# Altium PCB SWITCH_BLE_PCB_V1I1.PcbDoc
Units mil, origin at the board's own origin, x right, y up, seen from the top; angles counter-clockwise.
Board outline 2445 x 1750 mil, 2 copper layers (Top Layer, Bottom Layer); 19 components, 19 nets, 55 pads, 9 vias.
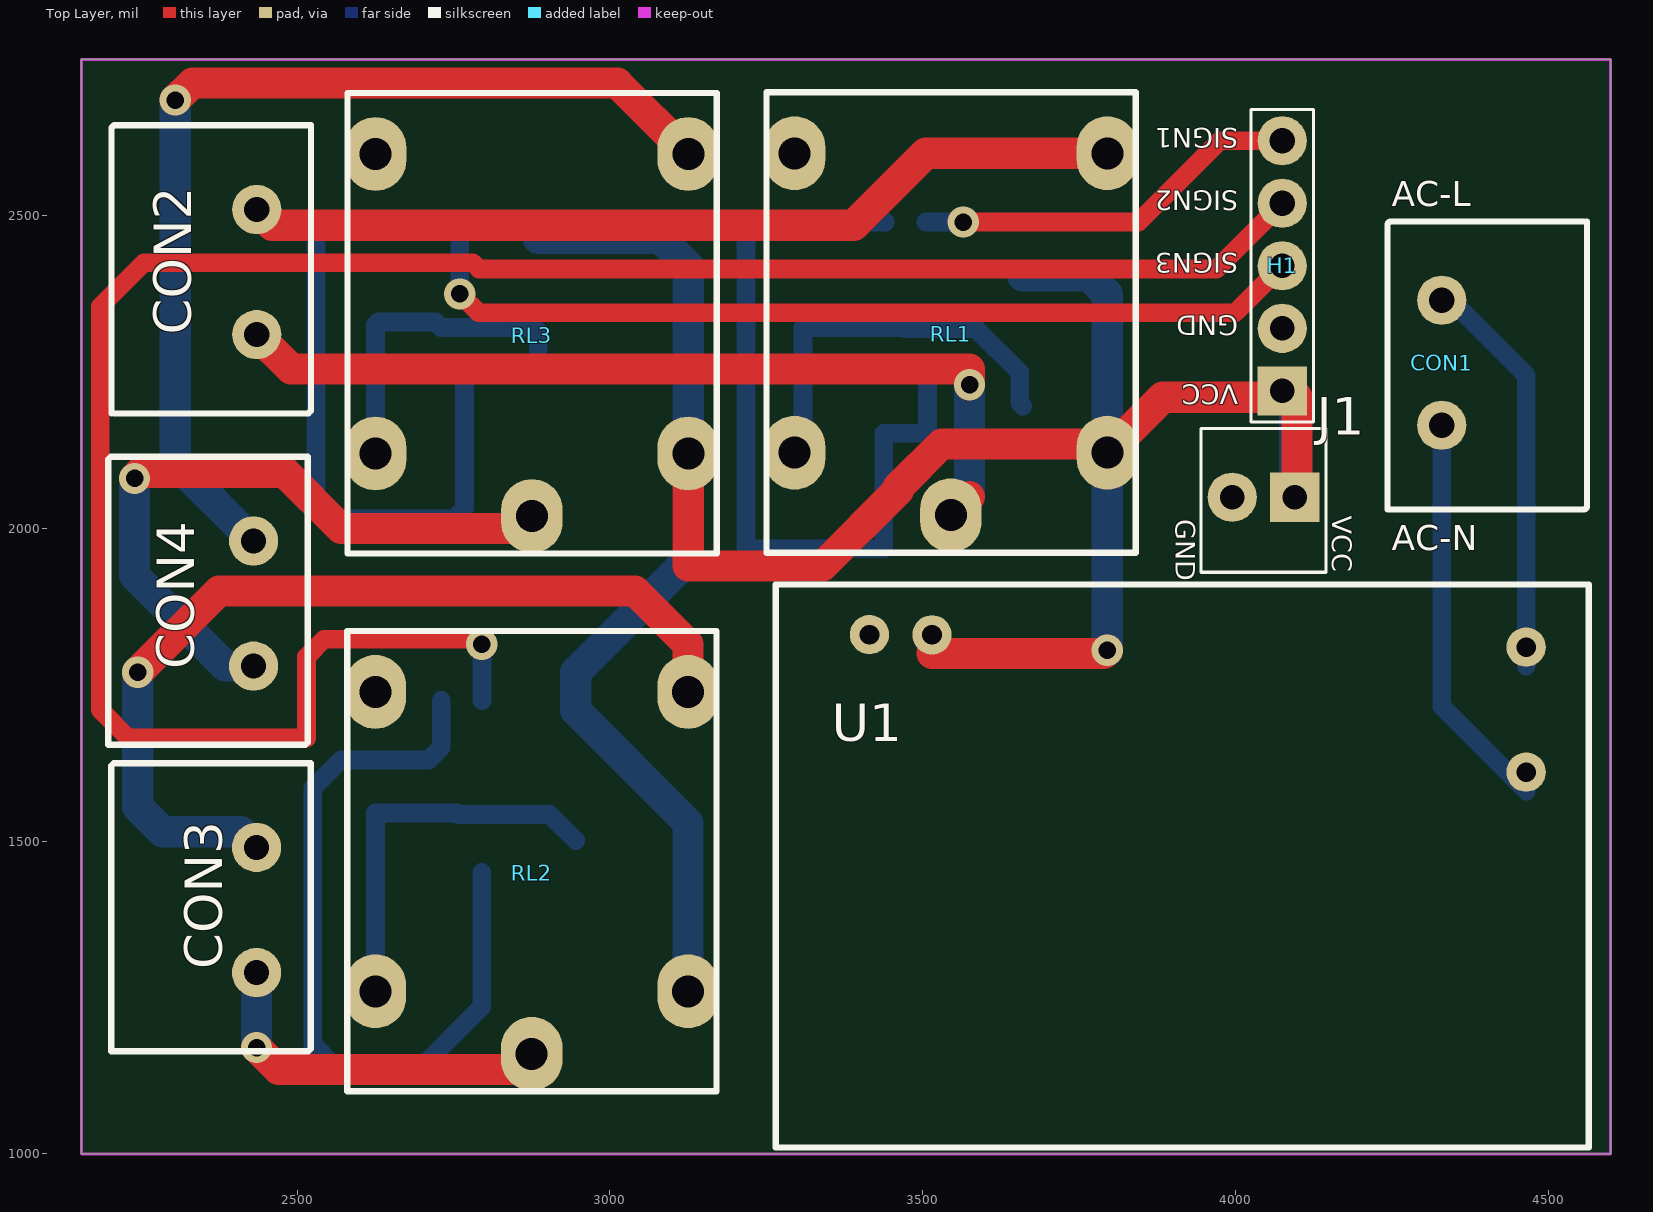
[diagram p0: Top Layer view]
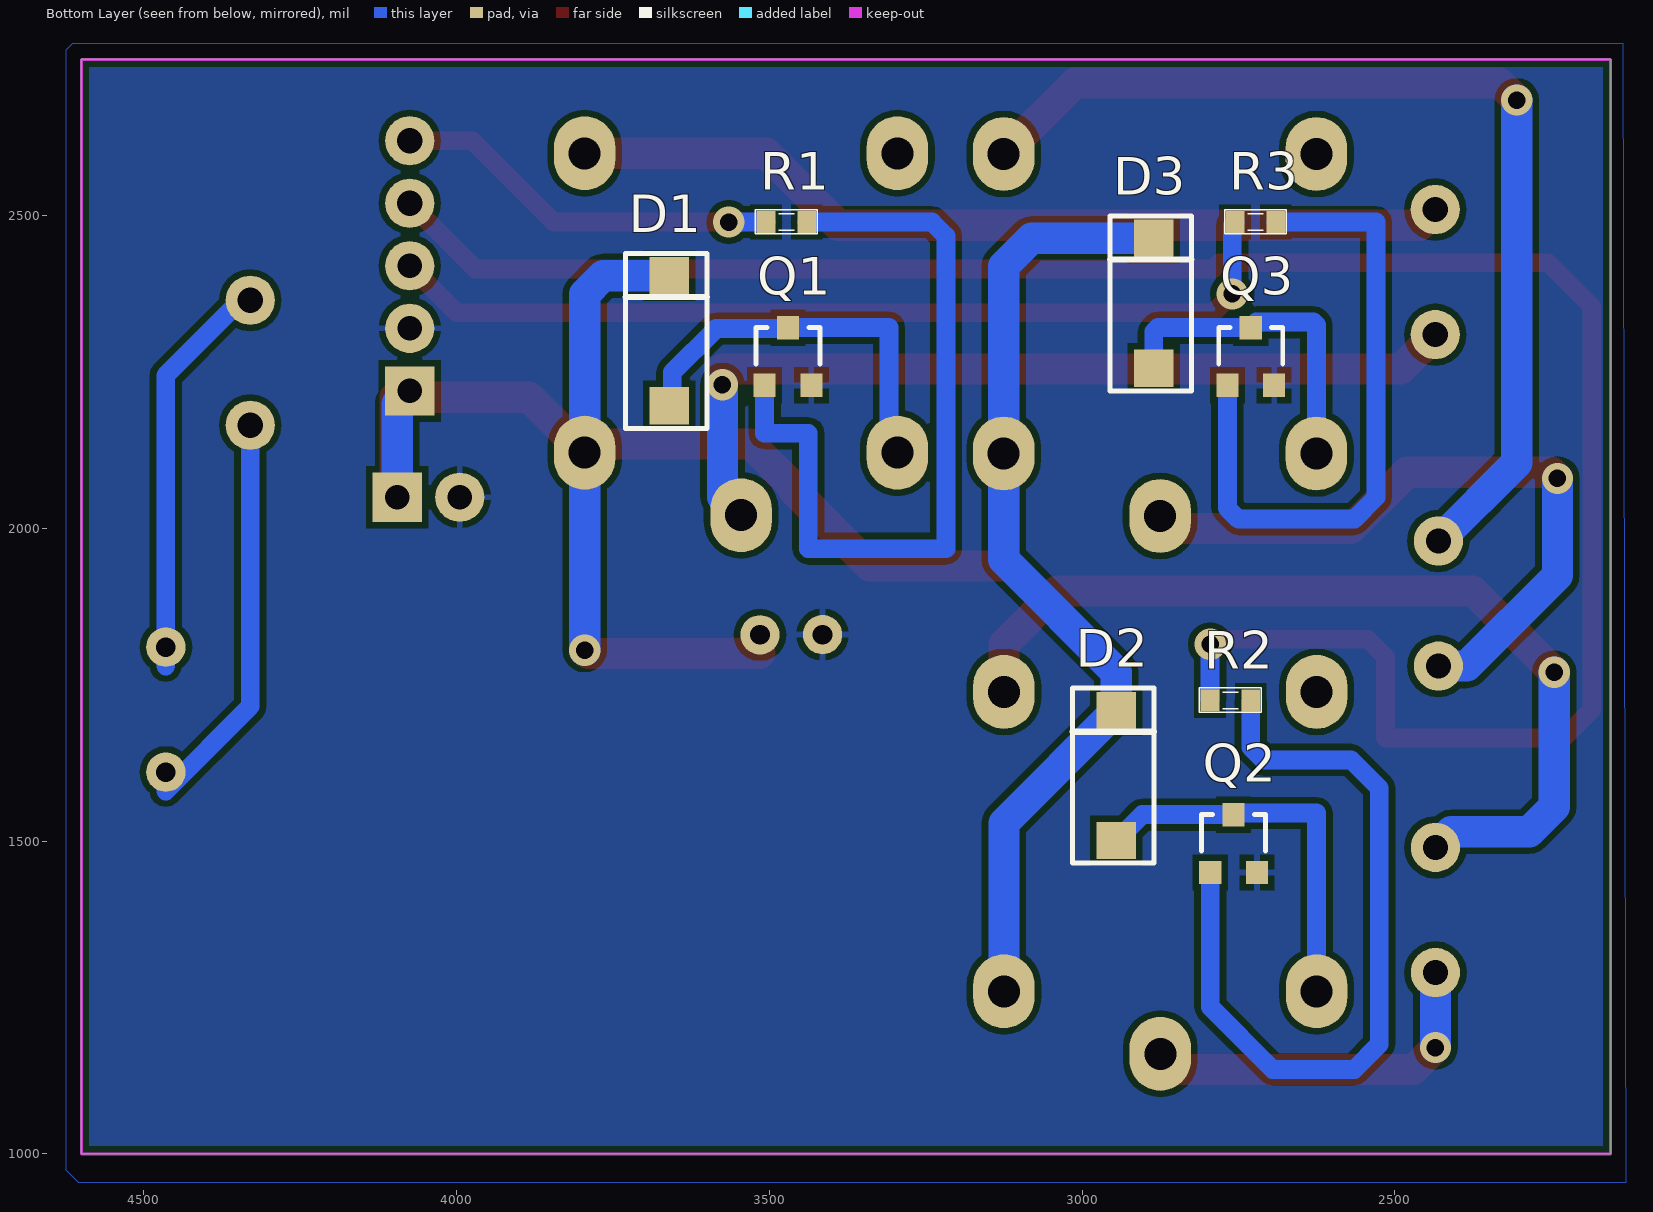
[diagram p1: Bottom Layer view, seen from below]
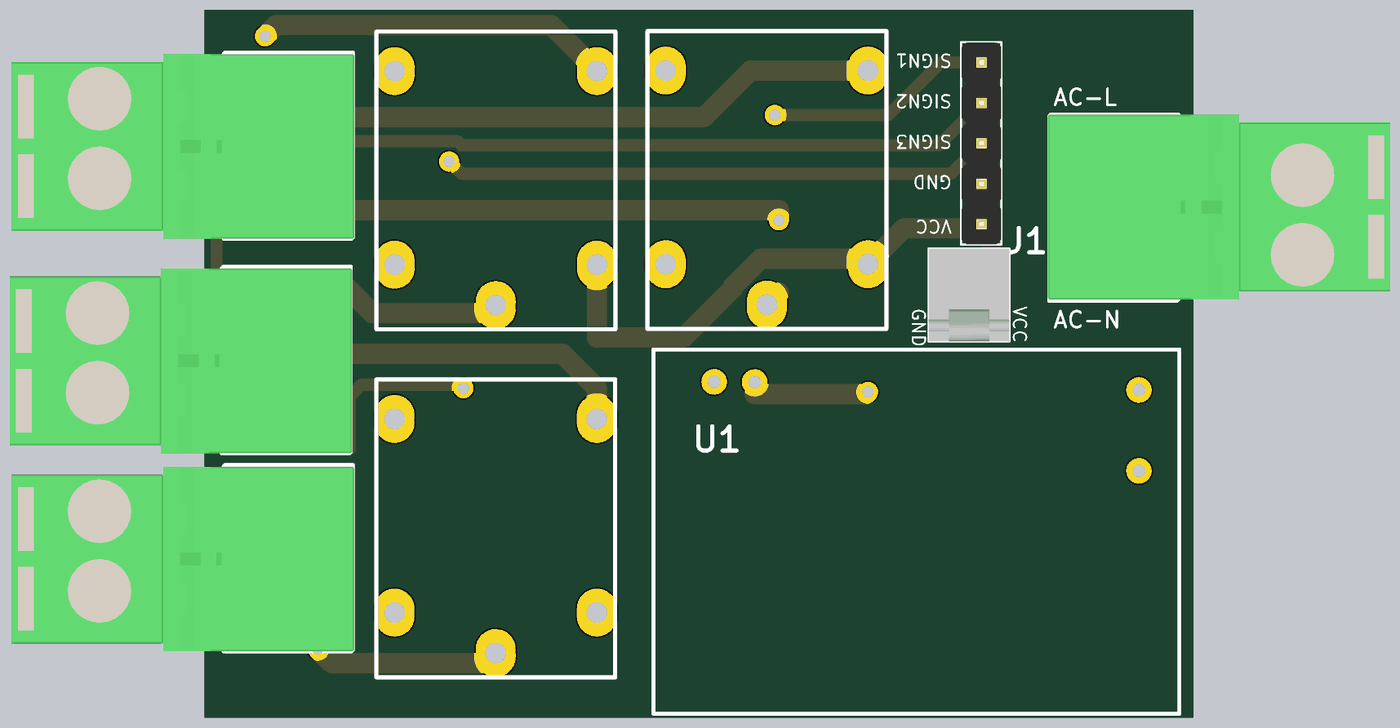
[diagram p2: 3D render of the assembled board from above, using the file's embedded part models]
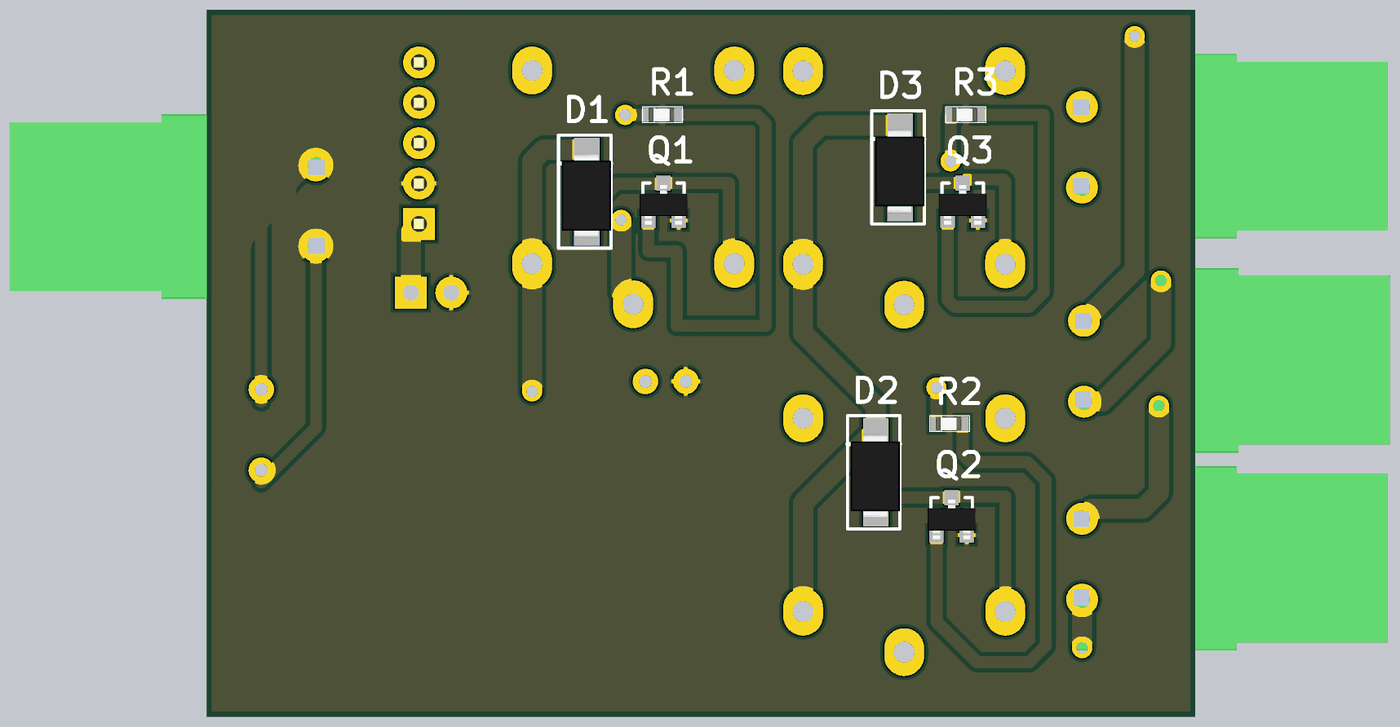
[diagram p3: 3D render of the assembled board from below, using the file's embedded part models]

## Layer stack, top to bottom
Top Solder: solder mask 0.4, Solder Resist, Dk 3.5
Top Layer: signal copper 1.4
Dielectric 1: dielectric 12.6, FR-4, Dk 4.8
Bottom Layer: signal copper 1.4
Bottom Solder: solder mask 0.4, Solder Resist, Dk 3.5

## Board outline
2155,1000 2155,2750 4600,2750 4600,1000

## Design rules (kind name [scope] priority, off if disabled: settings)
Clearance [All] p1: gap=10
PolygonConnect [All] p1: connectstyle=Relief reliefconductorwidth=10 reliefentries=4 polygonreliefangle="90 Angle" airgapwidth=10
RoutingVias [All] p1: holewidth=28 width=50 viastyle="Through Hole" minholewidth=28 minwidth=50 maxholewidth=28 maxwidth=50
SolderMaskExpansion [All] p1: expansion=4
Width [All] p1: maxlimit=100 minlimit=10 preferedwidth=25
30 further rules are at their usual default settings.

## Components (designator, comment, footprint, x,y, rotation, side; value= is the part's Value field where it differs from the comment)
CON1 "CON_HEADER_MALE_PIN2_5.08" CON_HEADER_MALE_VAC 4330,2365 r270 top
CON2 "CON_HEADER_MALE_PIN2_5.08" CON_HEADER_MALE_PIN2 2435.29,2310 r90 top
CON3 "CON_HEADER_MALE_PIN2_5.08" CON_HEADER_MALE_PIN2 2435,1290 r90 top
CON4 "CON_HEADER_MALE_PIN2_5.08" CON_HEADER_MALE_PIN2 2430.29,1780 r90 top
D1 "DIODE_M7_taobaoSMD_1A" DIODE_SMD_M7 3660,2300 r90 bottom
D2 "DIODE_M7_taobaoSMD_1A" DIODE_SMD_M7 2945.29,1605 r90 bottom
D3 "DIODE_M7_taobaoSMD_1A" DIODE_SMD_M7 2885.29,2360 r90 bottom
H1 "HEADER5_SIGN_HOLE_2.54" HEADER5_SIGN_HOLE_2.54 4075,2220 r90 top
J1 "5VCC" "CON_HEADER_MALE_POWER_PIN2_FRICTIONLOCK - duplicate" 4095,2050 r180 top
Q1 "TRAN-NPN-SMD" TRAN-NPN-SMD 3470.29,2275 r180 bottom
Q2 "TRAN-NPN-SMD" TRAN-NPN-SMD 2757.69,1496.26 r180 bottom
Q3 "TRAN-NPN-SMD" TRAN-NPN-SMD 2730.29,2275 r180 bottom
R1 "R_1K_SMD0603_1%_1/10W" RES_SMD0603 3460.29,2490 r180 bottom
R2 "R_1K_SMD0603_1%_1/10W" RES_SMD0603 2750.29,1725 r180 bottom
R3 "R_1K_SMD0603_1%_1/10W" RES_SMD0603 2710.29,2490 r180 bottom
RL1 "Relay 10A/12V" RELAY_HOLE5PINS_10A 3545.29,2021.26 r0 top
RL2 "Relay 10A/12V" RELAY_HOLE5PINS_10A 2875,1160 r0 top
RL3 "Relay 10A/12V" RELAY_HOLE5PINS_10A 2875.29,2020 r0 top
U1 "POWER_CONVERT_220VACto5VDC" POWER_CONVERT220VACto5VDC 4465,1810.32 r180 top

## Footprints (in the part's own frame and the unit in brackets; to place one, negate y for a bottom-side part, rotate by r counter-clockwise, add the part's x,y. Pads: shape width x height; smd on the part's side, far side on the other; paste and mask are expansions set on the pad)
CON_HEADER_MALE_PIN2 [mm]
  round 2 hole 1.02: 1(0,0) 2(5.08,0)
  silkscreen extent -3.2,-2.2 8.5,5.9, body extent -3.2,-2.3 8.4,19.2, height 15.5
"CON_HEADER_MALE_POWER_PIN2_FRICTIONLOCK - duplicate" [mm] "HEADER, SINGLE, DISTANCE = 100mil"
  rect 2x2 hole 1: 1(0,0)
  round 2 hole 1: 2(2.54,0)
  silkscreen extent -1.27,-2.79 3.81,3.05, body extent -1.27,-2.79 3.81,3.05, height 10.03
CON_HEADER_MALE_VAC [mm]
  round 2 hole 1.02: 1(0,0) 2(5.08,0)
  silkscreen extent -3.2,-2.2 8.5,5.9, body extent -3.2,-2.3 8.4,19.2, height 15.5
DIODE_SMD_M7 [mm]
  rect 1.52x1.6 smd: A(-2.64,0) K(2.64,0)
  silkscreen extent -3.56,-1.52 3.56,1.78, body extent -2.9,-1.52 2.4,1.58, height 2.4
HEADER5_SIGN_HOLE_2.54 [mm] "HEADER, SINGLE, DISTANCE = 100mil"
  rect 2x2 hole 1: 1(0,0)
  round 2 hole 1: 2(2.54,0) 3(5.08,0)
  round 2 hole 1.02: 4(7.62,0) 5(10.16,0)
  silkscreen extent -1.27,-1.27 11.43,1.27, body extent -1.27,-1.27 11.43,1.22, height 8.54
POWER_CONVERT220VACto5VDC [mm]
  round 1.6 hole 0.8: 1(0,0) 2(0,5.08) 3(26.67,-0.508) 4(24.13,-0.5)
  silkscreen extent -2.54,-2.54 30.48,20.32, body extent -1.27,-1.27 29.21,19.05, height 15
RELAY_HOLE5PINS_10A [mm]
  oval 2.5x3 hole 1.3: 1(0,0) 2(-6.35,14.7) 3(6.35,14.7) 4(-6.35,2.54) 5(6.35,2.54)
  silkscreen extent -7.49,-1.52 7.51,17.18, body extent -7.49,-1.52 7.49,17.14, height 16
RES_SMD0603 [mil] "Compoment SMD 60x30mil"
  rect 30x35 smd: 1(-45,0) 2(20,0)
  silkscreen extent -62,-19 37,20, body extent -46,-17 17,17, height 19
TRAN-NPN-SMD [mm] "SOT-23; 3 Leads; Body 3.0 x 2.5 mm, inc. leads (LxW max)"
  rect 0.9x0.95 smd: 1(-0.95,-1.175) 2(0.95,-1.175) 3(0,1.175)
  silkscreen extent -1.3,-0.3 1.3,1.18, body extent -1.5,-1.44 1.5,1.06, height 1.06

## Part data
CON1 CON2 CON3 CON4: "TERM BLOCK HDR 2POS R/A 5.08MM"
D1 D2 D3: "DIODE 1000V 1A SMD M7"
H1: "CONN HEADER 5 POS 2.54"
J1: library part CON_HEADER_POWER_MALE_PIN2_2.54_1, "CONN HEADER VERT 2POS .100 TIN"
Q1 Q2 Q3: "NPN 600mW, ECB"
R1 R2 R3: "RES SMD 1K OHM 1% 1/10W 0603"
RL1 RL2 RL3: library part RELAY_SPDT_HOLE5_10A_12VDC, "Relay SPDT,10A - 12VDC 5 Pin"

## Via types
v1: diameter 50, hole 28, Top Layer to Bottom Layer, 9 vias

## Nets (pads, with @x,y where several pads share a name; then routed paths per layer and width w, separated by ;. In a path a pad name is that pad's centre, name@x,y a point inside that pad or via, vN(x,y) a via of type N, cw(c..) or ccw(c..) an arc to the next point about the centre after c; other vN are vias at no path point)
5VCC: D1.K D2.K D3.K H1.1 J1.1 RL1.5 RL2.5 RL3.5 U1.4 | length 4185.4
  Top Layer w50: RL3.5 3125.29,1940 3340,1940 3461.08,2061.08 3461.08,2065.98 3530.09,2135 3781.55,2135 RL1.5 3884.03,2210 4098.74,2210 4098.74,2053.74 J1.1 ; U1.4@3515.29,1800 3790,1800 v1(3795.29,1805.29)
  Bottom Layer w50: D3.K 3081.06,2463.94 3125.29,2419.71 RL3.5 3125.29,1950.29 2945.29,1770.29 D2.K 3125,1529.23 RL2.5 ; D1.K 3766.06,2403.94 3795.29,2374.71 RL1.5 v1(3795.29,1805.29) ; H1.1 4095,2200 J1.1
GND: H1.2 J1.2 Q1.2 Q2.2 Q3.2 U1.3
NetCON1_1: CON1.1 U1.1 | length 649.5
  Bottom Layer w30: CON1.1 4345,2365 4465.29,2244.71 U1.1@4465.29,1780.32
NetCON1_2: CON1.2 U1.2 | length 640.7
  Bottom Layer w30: CON1.2 4330,1715.6 U1.2@4465.29,1580.32
NetCON2_1: CON2.1 RL1.1 | length 1450.6
  Top Layer w50: CON2.1 2490.29,2255 3575,2255 v1(3575,2230) ; RL1.1 RL1.1@3575,2050.97
  Bottom Layer w50: RL1.1 3575,2050.97 v1(3575,2230)
NetCON2_2: CON2.2 RL1.3 | length 1418
  Top Layer w50: CON2.2 2460.29,2485 3390,2485 3505,2600 RL1.3
NetCON3_1: CON3.1 RL2.1 | length 584.9
  Top Layer w50: v1(2435,1170) 2470,1135 2850,1135 RL2.1
  Bottom Layer w50: v1(2435,1170) CON3.1
NetCON3_2: CON3.2 RL2.3 | length 1477.2
  Top Layer w50: v1(2245,1770) 2375,1900 3040,1900 3125,1815 RL2.3
  Bottom Layer w50: v1(2245,1770) 2245,1555 2285,1515 2410,1515 CON3.2
NetCON4_1: CON4.1 RL3.1 | length 1090.3
  Top Layer w50: v1(2240,2080) 2250,2090 2480,2090 2570,2000 2855.29,2000 RL3.1
  Bottom Layer w50: v1(2240,2080) 2240,1925 2385,1780 CON4.1
NetCON4_2: CON4.2 RL3.3 | length 1635.7
  Top Layer w50: v1(2305,2685) 2332.5,2712.5 3011.53,2712.5 RL3.3
  Bottom Layer w50: v1(2305,2685) 2305,2105.29 CON4.2
NetD1_A: D1.A Q1.3 RL1.4 | length 637.4
  Bottom Layer w30: RL1.4 3308.74,2134.71 3308.74,2321.26 Q1.3 3471.84,2319.71 3585.29,2319.71 3655.29,2249.71 3655.29,2200.77 D1.A
NetD2_A: D2.A Q2.3 RL2.4 | length 623.5
  Bottom Layer w30: RL2.4 2625,1545 2755.21,1545 Q2.3 2903.83,1542.52 D2.A
NetD3_A: D3.A Q3.3 RL3.4 | length 532.2
  Bottom Layer w30: RL3.4 2625.29,2325.29 2630,2330 2721.55,2330 Q3.3 2878.74,2321.26 2885.29,2314.71 D3.A
NetQ1_1: Q1.1 R1.2 | length 1282.9
  Bottom Layer w30: R1.2 3240,2490 3217.69,2467.69 3217.69,1967.69 3437.69,1967.69 3437.69,2152.31 3507.69,2152.31 Q1.1
NetQ2_1: Q2.1 R2.2 | length 1260.1
  Bottom Layer w30: R2.2 2730.29,1650.29 2710,1630 2570,1630 2525,1585 2525,1175 2565,1135 2695,1135 2795.09,1235.09 Q2.1
NetQ3_1: Q3.1 R3.2 | length 1055.9
  Bottom Layer w30: R3.2 2530,2490 2530,2050 2565,2015 2750,2015 2767.69,2032.69 Q3.1
TIN_HIEU1: H1.5 R1.1 | length 623.6
  Top Layer w30: v1(3565,2490) 3845,2490 3975,2620 H1.5
  Bottom Layer w30: R1.1 v1(3565,2490)
TIN_HIEU2: H1.4 R2.1 | length 3475.1
  Top Layer w30: v1(2795.29,1814.71) 2787.2,1822.8 2542.8,1822.8 2515,1795 2515,1665 2230,1665 2185,1710 2185,2355 2255,2425 2780.71,2425 2790.71,2415 3970,2415 H1.4
  Bottom Layer w30: R2.1 v1(2795.29,1814.71)
TIN_HIEU3: H1.3 R3.1 | length 1475.4
  Top Layer w30: v1(2760,2375) 2790,2345 4000,2345 H1.3
  Bottom Layer w30: R3.1 2760,2485.29 v1(2760,2375)
pads on no net: RL1.2 RL2.2 RL3.2

## Polygon pours and split planes (outlines as drawn)
GND on Bottom Layer "top" (solid, remove dead copper, pour order 4): 2095,2800 4660,2800 4705,2755 4655,2705 4655,910 2160,910 2070,1000
GND on Bottom Layer "top" (solid, remove dead copper, shelved, pour order 2): 2135,2775 4615,2775 4625,2765 4625,975 4605,955 2130,955

## Keep-outs
Keep-Out Layer:
  lines w5: 2155,1000 4600,1000 4600,2750 2155,2750 2155,2725 2155,1000

## Text inside footprints (layer, text, board x,y; h text height)
CON1: Top Overlay "AC-N" at 4250,1965 h40; Top Overlay "AC-L" at 4250,2515 h40
H1: Top Overlay "SIGN1" at 4005,2640 h31.5 r180; Top Overlay "SIGN2" at 4005,2540 h31.5 r180; Top Overlay "SIGN3" at 4005,2440 h31.5 r180; Top Overlay "GND" at 4005,2340 h31.5 r180; Top Overlay "VCC" at 4005,2230 h31.5 r180
J1: Top Overlay "VCC" at 4155,2020 h31.5 r270; Top Overlay "GND" at 3905,2015 h31.5 r270